# Altium PCB ControllerBoard.PcbDoc
Units mil, origin at the board's own origin, x right, y up, seen from the top; angles counter-clockwise.
Board outline 2945 x 1510 mil, 2 copper layers (Top Layer, Bottom Layer); 39 components, 55 nets, 206 pads, 36 vias.
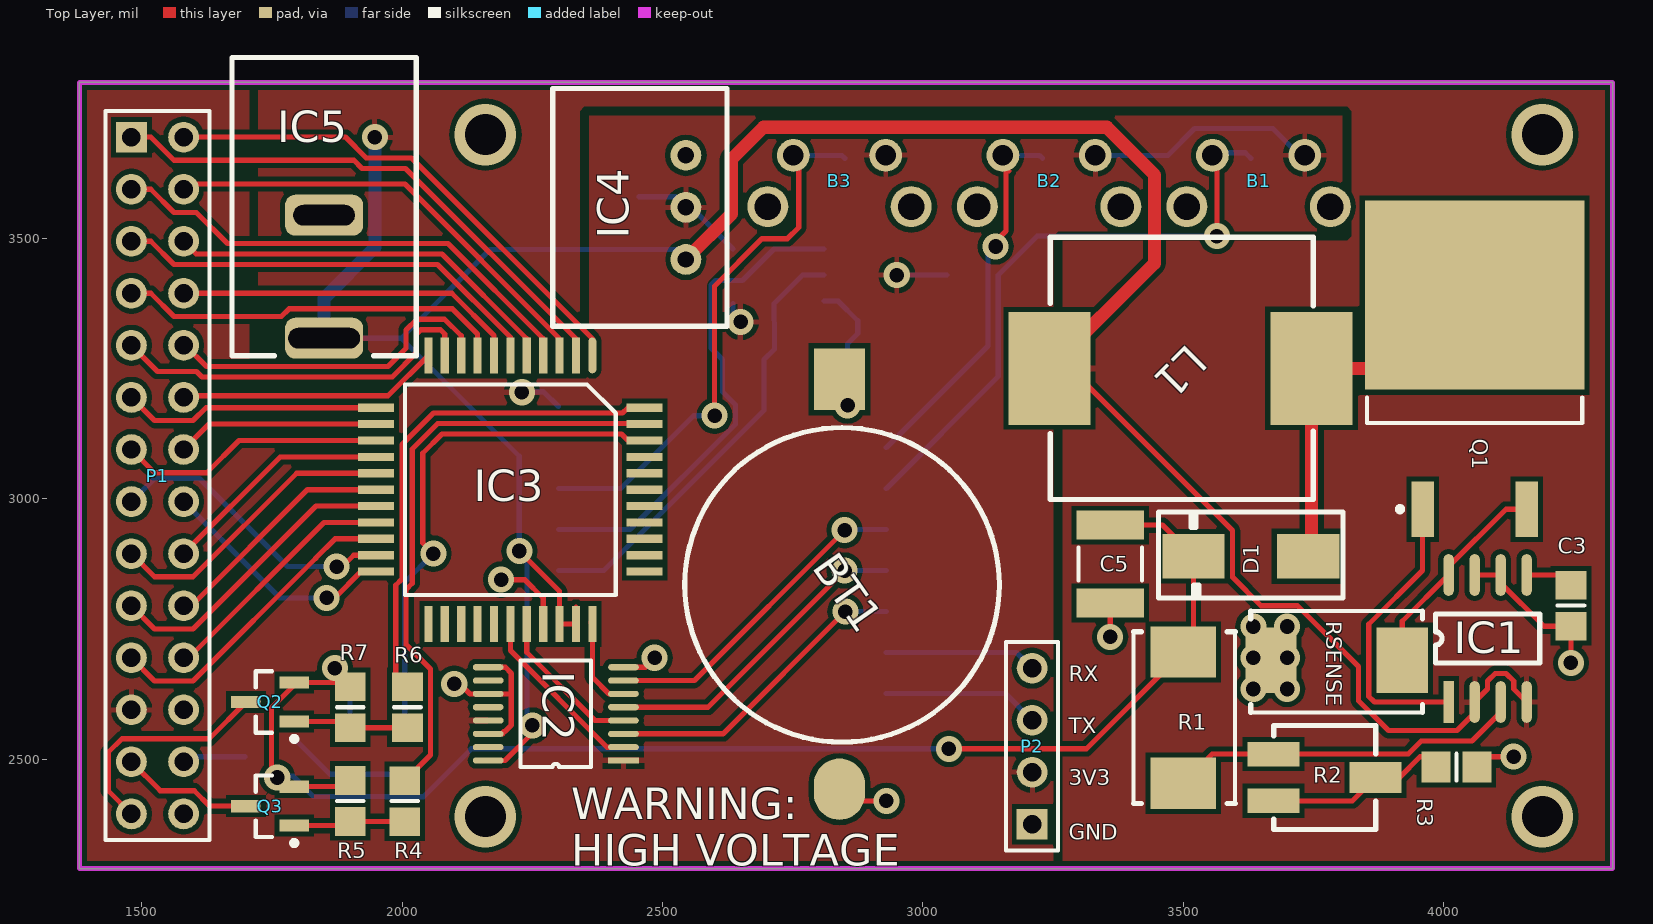
[diagram p0: Top Layer view]
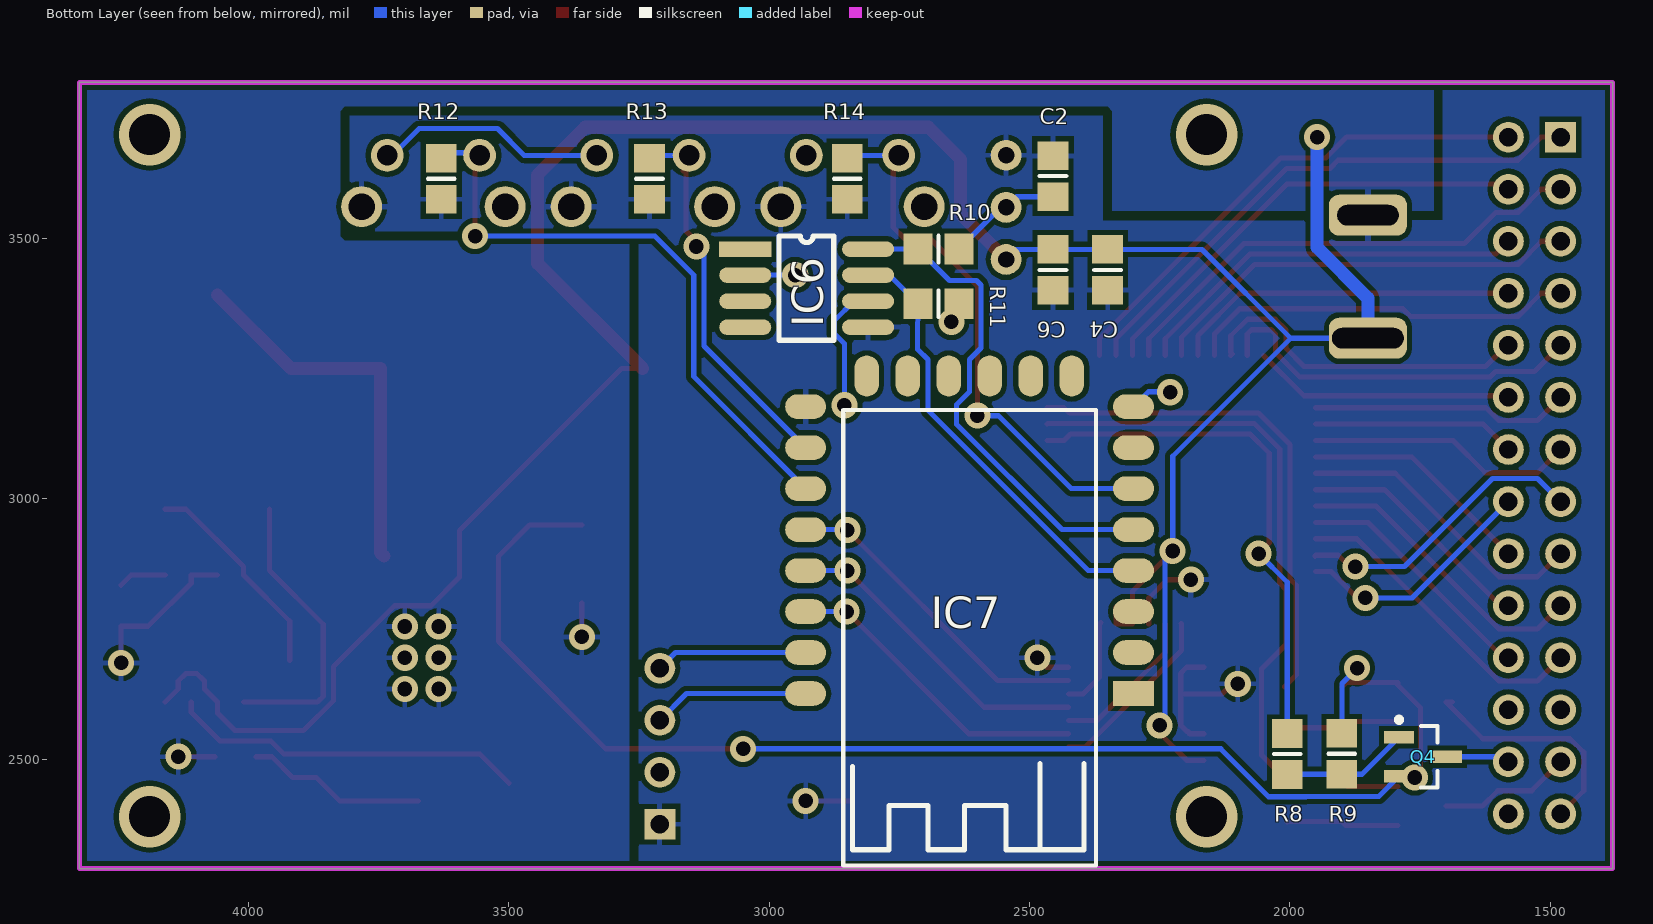
[diagram p1: Bottom Layer view, seen from below]

## Layer stack, top to bottom
Top Solder: solder mask 0.4, Solder Resist, Dk 3.5
Top Layer: signal copper 1.4
Dielectric 1: dielectric 12.6, FR-4, Dk 4.8
Bottom Layer: signal copper 1.4
Bottom Solder: solder mask 0.4, Solder Resist, Dk 3.5

## Board outline
1380,2290 4325,2290 4325,3800 1380,3800

## Design rules (kind name [scope] priority, off if disabled: settings)
Clearance [All] p1: gap=10 ignorepadtopadclearanceinfootprint=FALSE except(0: Arc-Hole Track-Hole SMDPad-Hole THPad-Hole Via-Hole Fill-Hole Poly-Hole Region-Hole Text-Hole)
PolygonConnect [All] p1: connectstyle=Relief reliefconductorwidth=10 reliefentries=4 polygonreliefangle="90 Angle" airgapwidth=10
RoutingVias [All] p1: holewidth=28 width=50 viastyle="Through Hole" minholewidth=28 minwidth=50 maxholewidth=28 maxwidth=50
SolderMaskExpansion [All] p1: expansion=4
Width [All] p1: maxlimit=25 minlimit=10 preferedwidth=10 minimp=50.000000 maximp=50.000000 favimp=50.000000
30 further rules are at their usual default settings.

## Components (designator, comment, footprint, x,y, rotation, side; value= is the part's Value field where it differs from the comment)
B1 "Button" PCBComponent_1 3645,3660 r180 top
B2 "Button" PCBComponent_1 3242.5,3660 r180 top
B3 "Button" PCBComponent_1 2840,3660 r180 top
BT1 "Battery" cr1220 2840,3230 r270 top
C2 "Cap" 6-0805_M 2455,3620 r270 bottom value=10uF
C3 "Cap" 6-0805_M 4245,2795 r90 top value=10uF
C4 "Cap" 6-0805_M 2350,3440 r90 bottom value=100nF
C5 "Cap2" 1812 3360,2875 r270 top value=4.7uF
C6 "Cap" 6-0805_M 2455,3440 r90 bottom value=10uF
D1 "Diode" DO-214AA 3630,2890 r180 top
IC1 "MAX1771ESA" SOIC-8(1.27MM) 4010,2610 r90 top
IC2 "CD4504B" TSSOP-1.2mm-16 2425,2497.64 r180 top
IC3 "HV5122" 44PQFP 2365.35,3275.75 r270 top
IC4 "R-78E3.3-1.0" R-78E3.3-1.0 2545,3560 r90 top
IC5 "BarrelConnector5.5" BARRELCONNECTOR5.5 1850,3545 r0 top
IC6 "DS3232MZ+" DS3231 3046,3480 r180 bottom
IC7 "ESP12-F" ESP12-F 2300.08,2626.26 r0 bottom
L1 "Inductor" Inductor12mm 3495,3250.75 r90 top value=100mH
P1 "Header 14X2A" HDR2X14_CEN 1480,3695 r270 top
P2 "Header 4" HDR1X4 3210,2375 r90 top
Q1 "MOSFET-N" D2PAK_M 4060,3250 r90 top
Q2 "A92" SOT-23B_M 1746.26,2610 r180 top
Q3 "A92" SOT-23B_M 1746.26,2410 r180 top
Q4 "A92" SOT-23B_M 1743.98,2505 r180 bottom
R1 "Res1" RES2512 3500,2580 r90 top value=1.5M
R2 "RPot" PVG3G 3674,2465 r270 top value=5K
R3 "Res1" 6-0805_M 4025,2485 r180 top value=10K
R4 "Res1" 6-0805_M 2010,2600 r270 top value=300K
R5 "Res1" 6-0805_M 1900,2600 r90 top value=10K
R6 "Res1" 6-0805_M 2005,2419.53 r270 top value=300K
R7 "Res1" 6-0805_M 1900,2420 r90 top value=10K
R8 "Res1" 6-0805_M 2005,2510 r270 bottom value=300K
R9 "Res1" 6-0805_M 1900,2510.63 r90 bottom value=10K
R10 "Res1" 6-0805_M 2675,3480 r180 bottom value=4.7K
R11 "Res1" 6-0805_M 2675,3375 r180 bottom value=4.7K
R12 "Res1" 6-0805_M 3630,3615 r270 bottom value=10K
R13 "Res1" 6-0805_M 3230,3615 r270 bottom value=10K
R14 "Res1" 6-0805_M 2850,3615 r270 bottom value=10K
RSENSE "Res1" RES2512 3795,2690 r0 top value=0.05

## Footprints (in the part's own frame and the unit in brackets; to place one, negate y for a bottom-side part, rotate by r counter-clockwise, add the part's x,y. Pads: shape width x height; smd on the part's side, far side on the other; paste and mask are expansions set on the pad)
6-0805_M [mm] "Chip Resistor, Body 2.0x1.2mm, IPC Low Density"
  rect 1.4x1.5 smd: 1(-1,0) 2(1,0)
  silkscreen extent 0,-0.65 0,0.65, body extent -1.07,-0.7 1.07,0.7, height 0.7
44PQFP [mm]
  oval 1.75x0.4 smd: 1(0,0)
  rect 1.75x0.4 smd: 2(0,-0.8) 3(0,-1.6) 4(0,-2.4) 5(0,-3.2) 6(0,-4) 7(0,-4.8) 8(0,-5.6) 9(0,-6.4) 10(0,-7.2) 11(0,-8) 23(13.1,-8) 24(13.1,-7.2) 25(13.1,-6.4) 26(13.1,-5.6) 27(13.1,-4.8) 28(13.1,-4) 29(13.1,-3.2) 30(13.1,-2.4) 31(13.1,-1.6) 32(13.1,-0.8) 33(13.1,0)
  rect 0.4x1.75 smd: 12(2.55,-10.55) 13(3.35,-10.55) 14(4.15,-10.55) 15(4.95,-10.55) 16(5.75,-10.55) 17(6.55,-10.55) 18(7.35,-10.55) 19(8.15,-10.55) 20(8.95,-10.55) 21(9.75,-10.55) 22(10.55,-10.55) 34(10.55,2.55) 35(9.75,2.55) 36(8.95,2.55) 37(8.15,2.55) 38(7.35,2.55) 39(6.55,2.55) 40(5.75,2.55) 41(4.95,2.55) 42(4.15,2.55) 43(3.35,2.55) 44(2.55,2.55)
  silkscreen extent 1.41,-9.14 11.69,1.14, body extent 1.4,-9.14 11.68,1.14, height 9
1812 [mm] "Chip Capacitor, Body 4.5x3.2mm, IPC High Density"
  rect 1.4x3.3 smd: 1(-1.9,0) 2(1.9,0)
  silkscreen extent -0.8,-1.55 0.8,1.55, body extent -2.4,-1.7 2.4,1.7, height 1.4
BARRELCONNECTOR5.5 [mm]
  rrect50% 3.81x2 hole 1 slot 3.5 at 0 deg: 1(0,-6)
  rrect50% 3.81x2 hole 1 slot 3 at 0 deg: 2(0,0)
  silkscreen extent -4.5,-6.86 4.5,7.7, body extent -4.44,-6.86 4.44,7.62, height 11
cr1220 [mm]
  rect 3x2.5 smd: 1(0,0)
  oval 3x2.5 smd: 2(20,0)
  silkscreen extent 2.36,-7.55 17.71,7.8, body extent 2.41,-7.62 21.84,7.75, height 4
D2PAK_M [mm] "D2-PAK, 4-Leads, Body 8.8x10.4mm, Pitch 2.54mm, Lead Span 15.1mm, IPC Low Density"
  rect 2.7x1.1 smd: 1(-6.85,2.54) 3(-6.85,-2.54)
  rect 9.2x10.7 smd: 2(3.6,0)
  silkscreen extent -6.97,-5.25 -1.4,5.25, body extent -2.65,-5.28 6.35,5.28, height 4.69
DO-214AA [mil]
  rect 120x86 smd: 1(-110,0) 2(110,0)
  silkscreen extent -177,-85 177,80
DS3231 [mil]
  rect 100x30 smd: 1(0,0)
  oval 100x30 smd: 2(0,-50) 3(0,-100) 4(0,-150) 5(236,-150) 6(236,-100) 7(236,-50) 8(236,0)
  silkscreen extent 65,-175 170,25, body extent 40,-185 195,30, height 69
ESP12-F [mm]
  rect 2x1.2 smd: 1(0,0)
  oval 2x1.2 smd: 2(0,-2) 3(0,-4) 4(0,-6) 5(0,-8) 6(0,-10) 7(0,-12) 8(0,-14) 15(16,-14) 16(16,-12) 17(16,-10) 18(16,-8) 19(16,-6) 20(16,-4) 21(16,-2) 22(16,0)
  oval 1.2x2 smd: 9(3.018,-15.492) 10(5.018,-15.492) 11(7.018,-15.492) 12(9.018,-15.492) 13(11.018,-15.492) 14(13.018,-15.492)
  silkscreen extent 1.84,-13.84 14.17,8.38, body extent 0,-15.49 16,8.38, height 1
HDR1X4 [mm] "Connector; Header; 4 Position"
  rect 1.5x1.5 hole 0.9: 1(0,0)
  round 1.5 hole 0.9: 2(2.54,0) 3(5.08,0) 4(7.62,0)
  silkscreen extent -1.27,-1.27 8.89,1.27
HDR2X14_CEN [mm] "Connector; Header; 14x2 Position"
  rect 1.5x1.5 hole 0.9: 1(0,0)
  round 1.5 hole 0.9: 2(2.54,0) 3(5.08,0) 4(7.62,0) 5(10.16,0) 6(12.7,0) 7(15.24,0) 8(17.78,0) 9(20.32,0) 10(22.86,0) 11(25.4,0) 12(27.94,0) 13(30.48,0) 14(33.02,0) 15(0,2.54) 16(2.54,2.54) 17(5.08,2.54) 18(7.62,2.54) 19(10.16,2.54) 20(12.7,2.54) 21(15.24,2.54) 22(17.78,2.54) 23(20.32,2.54) 24(22.86,2.54) 25(25.4,2.54) 26(27.94,2.54) 27(30.48,2.54) 28(33.02,2.54)
  silkscreen extent -1.27,-1.27 34.29,3.81
Inductor12mm [mm]
  rect 5.5x4 smd: 1(0,6.4) 2(0,-6.4)
  silkscreen extent -6.4,-6.48 6.4,6.35, body extent -6.48,-6.48 6.35,6.35, height 8
PCBComponent_1 [mm]
  round 2 hole 1.3: 1(-3.5,2.5) 4(3.5,2.5)
  round 1.6 hole 1: 2(-2.25,0) 3(2.25,0)
  body extent -3.94,-4.32 4.06,3.18, height 7
PVG3G [mil]
  rect 47x100 smd: 1(45,0) 3(-45,0)
  rect 59x100 smd: 2(0,196)
  silkscreen extent -100,0 100,196, body extent -100,0 100,230, height 79
R-78E3.3-1.0 [mm]
  round 1.5 hole 0.8: 1(-2.54,0) 2(0,0) 3(2.54,0)
  silkscreen extent -5.8,-2 5.8,6.5, body extent -5.84,-2.03 5.84,6.48, height 10.4
RES2512 [mm]
  rect 2.5x3.2 smd: 1(-3.2,0) 2(3.2,0)
  silkscreen extent -4.19,-2.54 4.19,2.41
SOIC-8(1.27MM) [mil]
  rect 80x20 smd: 1(0,0)
  oval 80x20 smd: 2(0,-50) 3(0,-100) 4(0,-150) 5(244,-150) 6(244,-100) 7(244,-50) 8(244,0)
  silkscreen extent 75,-175 169,25, body extent 45,-175 200,25, height 47
SOT-23B_M [mm] "SOT23, 3-Leads, Body 2.9x1.3mm, Pitch 0.95mm, Lead Span 2.4mm, IPC Low Density"
  rect 1.45x0.6 smd: 1(-1.175,0.95) 2(-1.175,-0.95) 3(1.175,0)
  silkscreen extent -1.3,-1.5 0.7,1.92, body extent -0.7,-1.5 0.7,1.5, height 1.14
TSSOP-1.2mm-16 [mm]
  rect 1.5x0.3 smd: 1(0,0)
  oval 1.5x0.3 smd: 2(0,-0.65) 3(0,-1.3) 4(0,-1.95) 5(0,-2.6) 6(0,-3.25) 7(0,-3.9) 8(0,-4.55) 9(6.6,-4.55) 10(6.6,-3.9) 11(6.6,-3.25) 12(6.6,-2.6) 13(6.6,-1.95) 14(6.6,-1.3) 15(6.6,-0.65) 16(6.6,0)
  silkscreen extent 1.58,-4.88 5.02,0.33, body extent 1.02,-4.95 5.59,0.38, height 1.2

## Part data
BT1: "Multicell Battery", LatestRevisionDate=17-Jul-2002, LatestRevisionNote="Re-released for DXP Platform.", PackageDescription="Battery; 2 Leads", PackageReference=BAT-2, Published=24-Mar-1999, Publisher="Altium Limited"
C2 C3 C4 C5 C6: "Capacitor", Publisher="Altium Limited"
  C2 C3 C4 C6: LatestRevisionDate=17-Jul-2002, LatestRevisionNote="Re-released for DXP Platform.", PackageDescription="Radial Cap, Thru-Hole; 2 Leads; 0.3 in Pin Spacing", PackageReference=RAD-0.3, Published=8-Jun-2000
  C5: PackageDescription="Capacitor; 2 Leads", PackageReference=CAPR5-4X5, Published=23-Sep-2002
D1: "Default Diode", Code_JEDEC=DO-214-AB, LatestRevisionDate=17-Jul-2002, LatestRevisionNote="Re-released for DXP Platform.", PackageDescription="DO-214-AB/SMC; 2 C-Bend Leads; Body 7.9 x 5.9 mm, inc. leads (LxW)", PackageReference=SMC, PackageVersion=Sep-1996, Published=8-Jun-2000, Publisher="Altium Limited"
IC6: "+/-5ppm, I2C Real-Time Clock with Internal MEMs Resonator and SRAM, 8-Pin SO, -40 to 85 degC, Pb-Free", Code_IPC=SOIC127P600-8, Code_JEDEC=MS-012-AA, ComponentLink1Description="Manufacturer URL", ComponentLink1URL=http://www.maxim-ic.com, ComponentLink2Description=Datasheet, ComponentLink2URL=http://datasheets.maxim-ic.com/en/ds/DS3232M.pdf, ComponentLink3Description="Package Specification", ComponentLink3URL=http://pdfserv.maxim-ic.com/package_dwgs/21-0041.PDF, DatasheetVersion="Rev 0, Mar-2012", PackageDescription="8-Pin Small-Outline IC, Narrow (0.15in), 1.27 mm Pitch, SOIC (N), Pb-Free", PackageReference=S8MK+1, PackageVersion="revC, 2010"
P1: "Header, 14-Pin, Dual row", LatestRevisionDate=17-Jul-2002, LatestRevisionNote="Re-released for DXP Platform.", Publisher="Altium Limited", System=Connector
P2: "Header, 4-Pin", LatestRevisionDate=17-Jul-2002, LatestRevisionNote="Re-released for DXP Platform.", Publisher="Altium Limited"
Q1: "N-Channel MOSFET", LatestRevisionDate=17-Jul-2002, LatestRevisionNote="Re-released for DXP Platform.", PackageDescription="TO, Flat Index; 3 In-Line, Axial Leads; Body Dia. 4.6mm; Lead Dia. 0.5 mm (max)", PackageReference=E3, PackageVersion=1995/1996, Published=8-Jun-2000, Publisher="Altium Limited"
Q2 Q3 Q4: library part PNP, "PNP Bipolar Transistor", LatestRevisionDate=29-May-2009, LatestRevisionNote="IPC-7351 Footprint Added.", PackageDescription="3-Pin SOT-23 Package 0.95 mm Pitch, 2.4 mm Lead Span", PackageReference=SOT-23B, PackageVersion=Aug-1999, Published=8-Jun-2000, Publisher="Altium Limited"
R1 R3 R4 R5 R6 R7 R8 R9 R10 R11 R12 R13 R14 RSENSE: "Resistor", LatestRevisionDate=17-Jul-2002, LatestRevisionNote="Re-released for DXP Platform.", PackageDescription="Axial Device, Thru-Hole; 2 Leads; 0.3 in Pin Spacing", PackageReference=AXIAL-0.3, Published=8-Jun-2000, Publisher="Altium Limited"
R2: "Potentiometer", LatestRevisionDate=17-Jul-2002, LatestRevisionNote="Re-released for DXP Platform.", PackageDescription="Variable Resistor, Thru-Hole; 3 Leads", PackageReference=VR5, Published=8-Jun-2000, Publisher="Altium Limited", Set Position=0.5, Sim Note="Enter the Resistance value and the set point into parameter fields."
L1: Code_IEC=1005, Code_JEITA=0402, LatestRevisionDate=29-May-2009, LatestRevisionNote="IPC-7351 Footprint Added.", PackageDescription="Chip Inductor", PackageReference=0402-A, Published=8-Jun-2000, Publisher="Altium Limited"

## Via types
v1: diameter 50, hole 28, Top Layer to Bottom Layer, 32 vias
v2: diameter 118.11, hole 78.74, Top Layer to Bottom Layer, 4 vias

## Nets (pads, with @x,y where several pads share a name; then routed paths per layer and width w, separated by ;. In a path a pad name is that pad's centre, name@x,y a point inside that pad or via, vN(x,y) a via of type N, cw(c..) or ccw(c..) an arc to the next point about the centre after c; other vN are vias at no path point)
3V3: B1.2 B2.2 B3.2 C2.2 IC2.1 IC2.13 IC4.2 IC6.2 IC7.8 P1.12 P2.2 R10.2 R11.2 | length 900.6
  Bottom Layer w10: v1(2230,3205) 2231.06,3206.06 2271.46,3206.06 IC7.8 ; C2.2 2524.37,3580.63 IC4.2 2555.63,3560 R10.2 ; R11.2 2635.63,3340 v1(2650,3340) ; v1(2950,3430) IC6.2 ; B2.2@3318.58,3660 B2.2 3470.66,3660 3522.16,3711.5 3672.09,3711.5 3713.58,3670 3713.58,3660 B1.2@3718.58,3665
12V: C4.2 C6.2 IC1.2 IC1.4 IC2.16 IC3.31 IC3.32 IC4.1 IC5.1 L1.1 | length 5360.3
  Top Layer w10: IC2.16 2197.64,2497.64 2250,2550 v1(2250,2565) ; v1(2225,2900) 2302.36,2822.64 IC3.31 IC3.32 IC3.32@2333.86,2792.04 ; L1.1 3283.46,3250.75 3595,2939.21 3595,2849.8 3649.8,2795 3720,2795 3836.77,2678.23 3836.77,2612.51 3894.28,2555 4026.21,2555 4060,2588.79 IC1.2 4085,2635 4085,2650.36 4099.64,2665 4120.36,2665 4135,2650.36 4135,2635 IC1.4
  Top Layer w25: IC4.1 2632.19,3547.19 2632.19,3652.19 2694,3714 3353.45,3714 3445,3622.44 3445,3452.72 L1.1
  Bottom Layer w10: IC5.1 1998.15,3308.78 ; v1(2250,2565) 2240,2575 2240,2885 v1(2225,2900) 2225,3081.93 1998.15,3308.78 ; IC4.1 2525.63,3479.37 C6.2 C4.2 2168.74,3479.37 1998.15,3308.78
  Bottom Layer w25: IC5.1 1850,3385.63 1947.5,3483.13 v1(1947.5,3695)
BT1: B1.3 IC7.17 R12.1 | length 1212.9
  Top Layer w10: B1.3@3541.42,3665 3565,3641.42 v1(3565,3505)
  Bottom Layer w10: IC7.17 3145,3234.96 3145,3430 3220,3505 v1(3565,3505) ; B1.3@3541.42,3665 3619.37,3665 R12.1
BT2: B2.3 IC7.16 R13.1 | length 806.4
  Top Layer w10: v1(3140,3485) 3140,3495 3160,3515 B2.3@3160,3660.16 ; B2.3@3141.42,3660 3130,3648.58 3146.58,3648.58 3165,3630.16
  Bottom Layer w10: IC7.16 3125,3293.7 3125,3470 v1(3140,3485) ; B2.3@3141.42,3660 B2.3 3224.37,3660 R13.1
BT3: B3.3 IC7.6 R14.1 | length 1054.4
  Top Layer w10: v1(2600,3160) 2600,3408.58 2691.42,3500 2740,3500 2761.58,3521.58 2761.58,3660 B3.3@2756.42,3660
  Bottom Layer w10: IC7.6 2419.96,3019.96 2560,3160 v1(2600,3160) ; B3.3@2756.42,3660 2844.37,3660 R14.1
CLK: IC2.4 IC3.29 | length 294.4
  Top Layer w10: IC3.29 2239.37,2705.63 2370.59,2574.41 IC2.4
GND: B1.1 B2.1 B3.1 BT1.2 C2.1 C3.1 C4.1 C5.2 C6.1 IC1.6 IC1.7 IC2.8 IC2.9 IC2.11 IC2.14 IC3.30 IC4.3 IC5.2 IC6.5 IC7.15 P2.1 R3.1 R12.2 R13.2 R14.2 RSENSE.1 | length 1157.1
  Top Layer w10: v1(2100,2645) 2110.8,2645 2130.21,2625.59 IC2.11 2209.09,2625.59 2209.69,2625 ; IC2.14 2192.75,2548.82 2196.18,2552.25 2195,2553.43 2195,2553.5 2197.44,2553.5 2209.69,2565.75 2209.69,2625 ; IC2.9 2198.23,2676.77 2210,2665 2209.69,2664.69 2209.69,2625 ; v1(2190,2845) 2235.26,2845 2270.87,2809.39 IC3.30 ; IC2.8 2466.77,2676.77 v1(2485,2695) ; BT1.2@2840,2420 v1(2930,2420) ; v1(3360,2735) C5.2 ; IC1.7 IC1.6 4110,2838.64 4193.01,2755.63 C3.1 v1(4245,2685) ; R3.1@4064.37,2505 v1(4135,2505)
  Bottom Layer w10: B3.1@2968.74,3575.63 2982.8,3561.57 B3.1@2996.85,3575.63 ; B2.1@3353.74,3575.63 3367.8,3561.57 B2.1@3381.85,3575.63 ; B1.1@3758.74,3575.63 B1.1@3767.8,3566.57
  other v1: 3635,2635 3700,2635 3635,2695 3700,2695 3635,2755 3700,2755
HV: C5.1 D1.2 Q2.2 Q3.2 Q4.2 R1.2 R5.2 R7.2 R9.2 | length 2815
  Top Layer w10: v1(1760,2465) 1748.98,2476.02 1748.98,2598.98 1792.52,2642.52 Q2.2 1891.97,2647.4 R5.2 ; Q3.2 1888.03,2447.4 R7.2 ; v1(3050,2520) 3314.02,2520 R1.2 3520,2725.98 D1.2 3460.2,2949.8 C5.1
  Bottom Layer w10: v1(1760,2465) 1762.6,2467.6 Q4.2 1829.13,2428.7 1968.63,2428.7 1969.26,2428.07 2040.74,2428.07 2132.67,2520 v1(3050,2520) ; v1(1870.8,2675) 1900,2645.8 R9.2
LED1: IC3.21 P1.8 | length 570.4
  Top Layer w10: v1(1873.98,2870) 1885,2870 1906.89,2891.89 IC3.21 IC3.21@1951.89,2890
  Bottom Layer w10: P1.8 1524.53,3039.53 1610.47,3039.53 1780,2870 v1(1873.98,2870)
LED2: IC3.22 P1.22 | length 467.5
  Top Layer w10: v1(1855,2810) 1870.55,2810 1920.94,2860.39 IC3.22
  Bottom Layer w10: P1.22 1765,2810 v1(1855,2810)
LEO: IC2.2 IC3.28 | length 346
  Top Layer w10: IC3.28@2208.49,2760.61 IC3.28 2207.87,2708.84 2393.49,2523.23 IC2.2
MPX1: P1.14 Q2.3 | length 453.4
  Top Layer w10: P1.14 1435.47,2439.53 1435.47,2513.44 1461.56,2539.53 1629.53,2539.53 Q2.3 Q2.3@1687.97,2610
MPX2: P1.13 Q3.3 | length 255.2
  Top Layer w10: P1.13 1535.47,2439.53 1600.47,2439.53 1630,2410 Q3.3
MPX3: P1.27 Q4.3 | length 143.1
  Top Layer w10: P1.27@1580,2480 P1.27@1595,2495
  Bottom Layer w10: P1.27 1590,2505 Q4.3
NetBT1_1: BT1.1 IC6.6 | length 251
  Bottom Layer w10: IC6.6 2837.43,3380 2875,3342.43 2875,3317.57 2855.63,3298.2 v1(2855.63,3180)
NetC3_2: C3.2 IC1.5 | length 93.1
  Top Layer w10: IC1.5 4225.37,2854 C3.2
NetD1_1: D1.1 L1.2 Q1.2 | length 735.1
  Top Layer w25: D1.1 3746.97,2896.97 L1.2 3919.02,3250.75 Q1.2
NetIC1_1: IC1.1 Q1.1 | length 560
  Top Layer w10: Q1.1 3960,2862.43 3856.77,2759.21 3856.77,2620.79 3867.57,2610 IC1.1
NetIC1_3: IC1.3 R1.1 R2.3 | length 686.3
  Top Layer w10: R1.1 3555.98,2510 R2.3 3932.33,2510 3957.33,2535 4055,2535 4110,2590 IC1.3
NetIC1_8: IC1.8 Q1.3 RSENSE.2 | length 412.6
  Top Layer w10: RSENSE.2 3920.98,2764.98 IC1.8 4010,2870 4120.31,2980.32 Q1.3
NetIC2_3: IC2.3 IC7.20 | length 602.3
  Top Layer w10: IC2.3 2616.3,2548.82 v1(2851.22,2783.74)
  Bottom Layer w10: v1(2851.22,2783.74) IC7.20
NetIC2_5: IC2.5 IC7.19 | length 613.7
  Top Layer w10: IC2.5 2587.52,2600 v1(2850,2862.48)
  Bottom Layer w10: v1(2850,2862.48) IC7.19
NetIC2_7: IC2.7 IC7.18 | length 625.1
  Top Layer w10: IC2.7 2561.18,2651.18 v1(2850,2940)
  Bottom Layer w10: v1(2850,2940) 2851.22,2941.22 IC7.18
NetIC3_42: IC3.42 R8.1 | length 1016.7
  Top Layer w10: v1(2060,2895) 2039.45,2915.55 2039.45,3087.88 2076.57,3125 2421.07,3125 2433.71,3112.36 IC3.42
  Bottom Layer w10: R8.1 2005,2840 v1(2060,2895)
NetIC3_43: IC3.43 R6.1 | length 1167.6
  Top Layer w10: R6.1@1997.67,2470 2005,2470 R6.1 2054.53,2508.43 2054.53,2673.14 2007.52,2720.15 2007.52,2826.09 2019.45,2838.02 2019.45,3096.16 2068.28,3145 2464.61,3145 IC3.43
NetIC3_44: IC3.44 R4.1 | length 975
  Top Layer w10: R4.1 1987.52,2661.85 1987.52,2834.38 1999.45,2846.31 1999.45,3104.45 2060,3165 2423.35,3165 2433.71,3175.35 IC3.44
NetIC7_21: IC7.21 P2.4 | length 292.4
  Bottom Layer w10: IC7.21 3180,2705 P2.4
NetIC7_22: IC7.22 P2.3 | length 301.2
  Bottom Layer w10: IC7.22 3158.74,2626.26 P2.3
NetQ2_2: Q2.1 R4.2 R5.1 | length 222.4
  Top Layer w10: Q2.1 1888.03,2572.6 R5.1 R4.2
NetQ3_2: Q3.1 R6.2 R7.1 | length 216
  Top Layer w10: Q3.1 1891.97,2372.6 R7.1 2004.53,2380.63 R6.2
NetQ4_2: Q4.1 R8.2 R9.1 | length 244.5
  Bottom Layer w10: Q4.1 1861.38,2471.26 R9.1 2004.37,2471.26 R8.2
NetR2_1: R2.1 R2.2 R3.2 | length 346.8
  Top Layer w10: R2.1 3825,2420 R2.2 3915.61,2465 3955.61,2505 R3.2@3985.63,2505
SCL: IC6.8 IC7.5 R10.1 | length 956
  Bottom Layer w10: IC7.5 2437.79,2941.22 2640,3143.43 2640,3180.93 2615,3205.93 2615,3267.93 2593.07,3289.86 2593.07,3410.74 2601.86,3419.53 2653.9,3419.53 R10.1 IC6.8
SDA: IC6.7 IC7.4 R11.1 | length 853.9
  Bottom Layer w10: IC7.4 2387.33,2862.48 2695.24,3170.38 2695.24,3267.93 2715,3287.69 2715,3307.79 R11.1 2769.37,3430 IC6.7
SER: IC2.6 IC3.33 | length 179.1
  Top Layer w10: IC3.33@2362.68,2762.68 IC3.33 2365.35,2657.64 2397.4,2625.59 IC2.6
TM1: IC3.1 P1.15 | length 977.8
  Top Layer w10: P1.15 1890.93,3695 1930.93,3655 2018.14,3655 2365.35,3307.79 IC3.1
TM2: IC3.2 P1.1 | length 1046.3
  Top Layer w10: P1.1 1517.03,3695 1561.56,3650.47 1907.17,3650.47 1922.65,3635 2006.65,3635 2333.86,3307.79 IC3.2
TM3: IC3.3 P1.16 | length 881.7
  Top Layer w10: P1.16 1590,3605 2005.15,3605 2302.36,3307.79 IC3.3
TM4: IC3.4 P1.2 | length 941.9
  Top Layer w10: P1.2 1517.03,3595 1561.56,3550.47 1604.53,3550.47 1664.37,3490.63 2088.02,3490.63 2270.87,3307.79 IC3.4
TM5: IC3.5 P1.17 | length 769
  Top Layer w10: P1.17 1604.37,3470.63 2076.53,3470.63 2239.37,3307.79 IC3.5
TM6: IC3.6 P1.3 | length 839.2
  Top Layer w10: P1.3 1517.03,3495 1561.56,3450.47 2068.11,3450.47 2207.87,3310.7 IC3.6
TM7: IC3.7 P1.18 | length 668.1
  Top Layer w10: P1.18 2095.29,3395 2176.38,3313.92 IC3.7
TM8: IC3.8 P1.4 | length 750.7
  Top Layer w10: P1.4 1517.03,3395 1561.56,3350.47 1767.64,3350.47 1782.37,3365.2 2096.81,3365.2 2144.88,3317.13 IC3.8
TM9: IC3.9 P1.19 | length 657.7
  Top Layer w10: P1.19 1583.28,3295 1623.87,3254.41 1972.49,3254.41 2007.52,3289.44 2007.52,3324.69 2028.02,3345.2 2081.55,3345.2 2113.39,3313.36 IC3.9@2113.39,3281.16 ; IC3.9@2110.68,3278.45 IC3.9
TM10: IC3.10 P1.5 | length 729.6
  Top Layer w10: P1.5 1530,3245 1605,3245 1615.59,3234.41 1980.77,3234.41 2027.52,3281.16 2027.52,3316.41 2036.31,3325.2 2073.27,3325.2 2081.89,3316.58 IC3.10
TM11: IC3.11 P1.20 | length 503.8
  Top Layer w10: P1.20 1583.23,3198.23 1972.87,3198.23 IC3.11
TM12: IC3.12 P1.6 | length 498.8
  Top Layer w10: P1.6 1524.53,3150.47 1598.44,3150.47 1623.33,3175.35 IC3.12
TM13: IC3.13 P1.21 | length 390.2
  Top Layer w10: P1.21 1628.86,3143.86 IC3.13
TM14: IC3.14 P1.7 | length 514.1
  Top Layer w10: P1.7 1524.53,3050.47 1624.53,3050.47 1686.42,3112.36 IC3.14
TM15: IC3.15 P1.23 | length 447
  Top Layer w10: P1.23 1765.87,3080.87 IC3.15
TM16: IC3.16 P1.9 | length 570.8
  Top Layer w10: P1.9 1524.53,2850.47 1598.44,2850.47 1797.34,3049.37 IC3.16
TM17: IC3.17 P1.24 | length 462.3
  Top Layer w10: P1.24 1595,2795 1817.87,3017.87 IC3.17
TM18: IC3.18 P1.10 | length 586.2
  Top Layer w10: P1.10 1524.53,2750.47 1598.44,2750.47 1834.35,2986.38 IC3.18
TM19: IC3.19 P1.25 | length 477.6
  Top Layer w10: P1.25 1590,2695 1849.88,2954.88 IC3.19
TM20: IC3.20 P1.11 | length 601.8
  Top Layer w10: P1.11 1524.53,2650.47 1598.44,2650.47 1833.98,2886.01 1833.98,2886.57 1870.8,2923.39 IC3.20
pads on no net: B1.4 B2.4 B3.4 IC2.10 IC2.12 IC2.15 IC3.23 IC3.24 IC3.25 IC3.26 IC3.27 IC3.34 IC3.35 IC3.36 IC3.37 IC3.38 IC3.39 IC3.40 IC3.41 IC6.1 IC6.3 IC6.4 IC7.1 IC7.2 IC7.3 IC7.7 IC7.9 IC7.10 IC7.11 IC7.12 IC7.13 IC7.14 P1.26 P1.28
copper on no net:
  other v2: 2160,2390 4190,2390 2160,3700 4190,3700

## Polygon pours and split planes (outlines as drawn)
3V3 on Top Layer "Top Layer-3V3" (solid, pour order 22): 1380,2290 3251,2290 3251,3505 3260,3514 3806,3514 3806,3736 2359,3736 2359,3545 2359,3260 1706,3268.64 1706,3545 1706,3800 1380,3800
12V on Top Layer "Top Layer-12V" (solid, pour order 24): 1724,3281.16 2341,3281.16 2341,3745 2350,3754 3815,3754 3824,3745 3824,3505 3815,3496 3269,3496 3269,2290 4325,2290 4325,3800 1724,3800
GND on Bottom Layer "Bottom Layer-GND" (solid, pour order 23): 1380,2290 3251,2290 3251,3505 3260,3514 3806,3514 3806,3736 2359,3736 2359,3545 2359,3534.5 1706,3535.5 1706,3545 1706,3800 1380,3800
GND on Bottom Layer "Bottom Layer-GND 1" (solid, pour order 21): 1724,3554 2341,3554 2341,3745 2350,3754 3815,3754 3824,3745 3824,3505 3815,3496 3269,3496 3269,2290 4325,2290 4325,3800 1724,3800

## Keep-outs
Keep-Out Layer:
  the board outline again, w10

## Silkscreen, mask and mechanical layers (free items; w line width, h text height)
Top Overlay:
  region: 3475,3530
  text "RX" at 3280,2650 h30
  text "TX" at 3280,2550 h30
  text "3V3" at 3280,2450 h30
  text "GND" at 3280,2345 h30
  text "WARNING: / HIGH VOLTAGE" at 2325,2295 h60